# Altium PCB PA_Channel_RF.PcbDoc
Units mm, origin at the board's own origin, x right, y up, seen from the top; angles counter-clockwise.
Board outline 159.75 x 29.25 mm, 2 copper layers (Top Layer, Bottom Layer), stack 1.071 mm thick; 118 components, 85 nets, 368 pads, 403 vias.
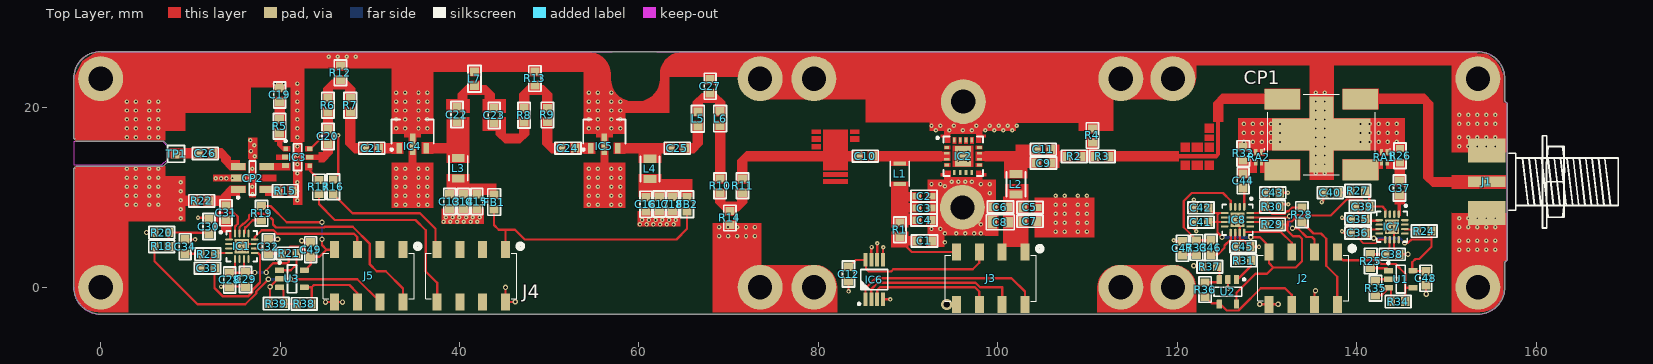
[diagram p0: Top Layer view]
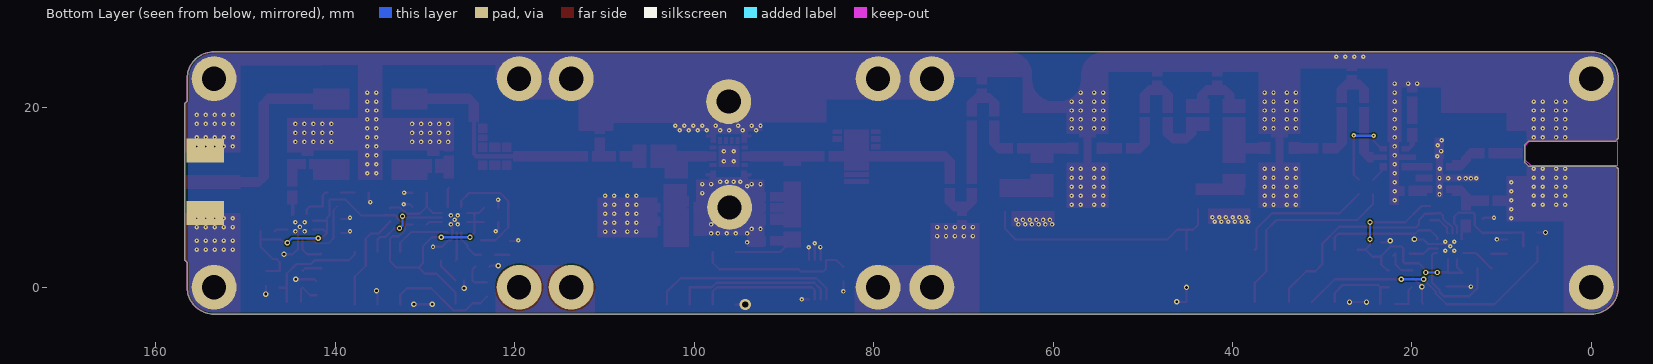
[diagram p1: Bottom Layer view, seen from below]
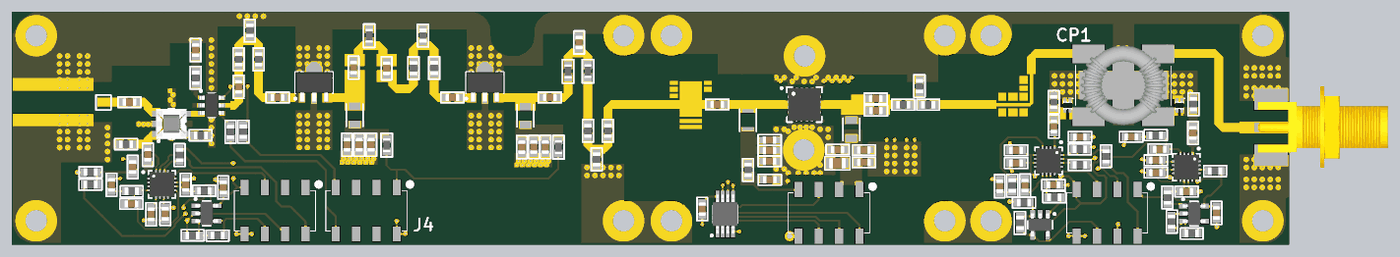
[diagram p2: 3D render of the assembled board from above, using the file's embedded part models]

## Layer stack, top to bottom
Top Solder: solder mask 0.0102, Solder Resist, Dk 3.5
Top Layer: signal copper 0.0356
Dielectric1: core 1, FR-4, Dk 4.8
Bottom Layer: signal copper 0.0356
Bottom Solder: solder mask 0.0102, Solder Resist, Dk 3.5

## Board outline
-3,0 -3,13.2 -2.7,13.5 7,13.5 7.4,13.9 7.4,15.9 7,16.3 -2.7,16.3 -3,16.6 -3,23.3 cw(c-0.05,23.3) -0.05,26.25 153.5,26.25 cw(c153.5,23.25) 156.5,23.25 156.5,20.75 156.75,20.5 156.75,3 156.5,2.75 156.5,0 cw(c153.5,0) 153.5,-3 0,-3 cw(c0,0)
cut-out: -2.925,16.25 6.9,16.25 7.4,15.7 7.4,14.2 6.775,13.575 -2.925,13.575

## Design rules (kind name [scope] priority, off if disabled: settings)
Clearance [All] p1: gap=0.152
PolygonConnect [All] p1: connectstyle=Direct reliefconductorwidth=0.254 reliefentries=4 polygonreliefangle="90 Angle" airgapwidth=0.254
RoomDefinition U_Output_protection [InComponentClass('U_Output_protection')] p1: confinementstyle=ConfineIn formatcopy=TRUE lockcomponents=FALSE outline 168.175,-30.4 179.075,-30.4 179.075,-7.725 168.175,-7.725
RoomDefinition U_Power_Stage [InComponentClass('U_Power_Stage')] p2: confinementstyle=ConfineIn formatcopy=TRUE lockcomponents=FALSE outline 117.525,-2.4 153.775,-2.4 153.775,25.6 117.525,25.6
RoomDefinition U_Preamp_protection [InComponentClass('U_Preamp_protection')] p3: confinementstyle=ConfineIn formatcopy=TRUE lockcomponents=FALSE outline -1.45,-2.1 75.825,-2.1 75.825,24.7 -1.45,24.7
RoomDefinition PA_Channel [InComponentClass('PA_Channel')] p4: confinementstyle=ConfineIn formatcopy=TRUE lockcomponents=FALSE outline 76.8,25.725 115.875,25.725 115.875,-1.525 76.8,-1.525
RoutingVias [All] p1: holewidth=0.711 width=1.27 viastyle="Through Hole" minholewidth=0.2 minwidth=0.5 maxholewidth=0.711 maxwidth=1.27
SolderMaskExpansion [All] p1: expansion=0.102
Width [All] p1: maxlimit=0.254 minlimit=0.152 preferedwidth=0.254
30 further rules are at their usual default settings.

## Classes and differential pairs
component class U_Output_protection: C35 C36 C37 C38 C39 C40 C41 C42 C43 C44 C45 C46 C47 C48 CP1 IC7 IC8 J2 R24 R25 R26 R27 R28 R29 R30 R31 R32 R33 R34 R35 R36 R37 RA1 RA2 U1 U2
component class PA_Channel: J1 TP1
component class U_Power_Stage: C1 C2 C3 C4 C5 C6 C7 C8 C9 C10 C11 C12 IC2 IC6 J3 L1 L2 R1 R2 R3 R4
component class U_Preamp_protection: C13 C14 C15 C16 C17 C18 C19 C20 C21 C22 C23 C24 C25 C26 C27 C28 C29 C30 C31 C32 C33 C34 C49 CP2 FB1 FB2 IC1 IC3 IC4 IC5 J4 J5 L3 L4 L5 L6 L7 R5 R6 R7 R8 R9 R10 R11 R12 R13 R14 R15 R16 R17 R18 R19 R20 R21 R22 R23 R38 R39 U3

## Components (designator, comment, footprint, x,y, rotation, side; value= is the part's Value field where it differs from the comment)
C1 "4.7u" 0603C#1 91.805,5.156 r0 top
C2 "10n" 0603C#2 91.775,10.15 r0 top
C3 "1n" 0603C#3 91.775,8.825 r0 top
C4 "100p" 0603C#4 91.775,7.475 r0 top
C5 "10n" 0603C#5 103.565,8.89 r0 top
C6 "1n" 0603C#6 100.289,8.941 r180 top
C7 "100p" 0603C#6 103.565,7.341 r0 top
C8 "10u/50V" 0805C 100.263,7.239 r180 top
C9 "680n" 0603C#6 105.089,13.843 r0 top
C10 "680n" 0603C#6 85.227,14.605 r0 top
C11 "1n" 0603C#6 105.064,15.367 r0 top
C12 "10n" 0603C#6 83.35,1.475 r90 top
C13 "4.7u" 0603C#6 38.9,9.55 r270 top
C14 "1n" 0603C#6 40.425,9.55 r270 top
C15 "10n" 0603C#6 41.925,9.55 r270 top
C16 "4.7u" 0603C#6 60.775,9.25 r270 top
C17 "1n" 0603C#6 62.275,9.275 r270 top
C18 "10n" 0603C#6 63.725,9.275 r270 top
C19 "680p" 0603C#6 19.949,21.438 r90 top
C20 "680p" 0603C#6 25.333,16.815 r90 top
C21 "680p" 0603C#6 30.21,15.494 r0 top
C22 "56p" 0603C#6 39.71,19.253 r90 top
C23 "220p" 0603C#6 43.85,19.15 r270 top
C24 "680p" 0603C#6 52.08,15.494 r0 top
C25 "680p" 0603C#6 64.272,15.494 r0 top
C26 "680p" 0603C#6 11.668,14.91 r0 top
C27 "5.6p" 0603C#6 67.929,22.403 r270 top
C28 "100n" 0603C#6 14.375,0.825 r270 top
C29 "100p" 0603C#6 16.15,0.875 r270 top
C30 "100n" 0603C#6 12.075,6.756 r270 top
C31 "470n" 0603C#6 13.98,8.306 r270 top
C32 "100n" 0603C#6 18.7,4.525 r270 top
C33 "100n" 0603C#6 11.9,2.125 r180 top
C34 "100n" 0603C#6 9.425,4.525 r90 top
C35 "100n" 0603C#6 140.125,7.6 r180 top
C36 "100p" 0603C#6 140.125,6.05 r180 top
C37 "470n" 0603C#6 144.764,11.049 r270 top
C38 "100n" 0603C#6 143.95,3.675 r180 top
C39 "100n" 0603C#6 140.6,9 r0 top
C40 "100n" 0603C#6 137.05,10.55 r180 top
C41 "100n" 0603C#6 122.625,7.25 r180 top
C42 "100p" 0603C#6 122.625,8.85 r180 top
C43 "100n" 0603C#6 130.625,10.525 r180 top
C44 "470n" 0603C#6 127.34,11.862 r270 top
C45 "100n" 0603C#6 127.3,4.525 r180 top
C46 "100n" 0603C#6 123.75,4.425 r90 top
C47 "100n" 0603C#6 120.575,4.35 r90 top
C48 "100n" 0603C#6 147.7,1 r90 top
C49 "100n" 0603C#6 23.403,4.191 r270 top
CP1 "COUPLER_CUST_TF" COUPLER_CUST_TF 136.052,17.018 r0 top
CP2 "20dB" XFMR_MINI-CIRCUITS_AT224 16.925,12.175 r90 top
FB1 "100R/1A" 0603L 43.85,9.5 r270 top
FB2 "100R/1A" 0603L 65.35,9.25 r270 top
IC1 "ADL5904ACPZN-R7" QFN50P300X300X80_HS-17N 15.732,4.572 r0 top
IC2 "RF_NPA1003QA" QFN65P400X400X80_HS-17N 96.125,14.6 r0 top
IC3 "HMC544A" SOT95P280X130-6N 21.955,14.503 r0 top
IC4 "MMG3012N" SOT89-150P410X170-3N 34.782,17.348 r90 top
IC5 "MMG3H21N" SOT89-150P410X170-3N 56.144,17.348 r90 top
IC6 "MCP9801-M/MS" SOP65P490X110-8N 86.225,0.85 r90 top
IC7 "ADL5904ACPZN-R7" QFN50P300X300X80_HS-17N 143.926,6.731 r270 top
IC8 "ADL5904ACPZN-R7" QFN50P300X300X80_HS-17N 126.7,7.525 r270 top
J1 "SMA" MOLEX_73251-2121 154.5,11.75 r180 top
J2 "ZL264-8DG" ZL264-8DG 134.02,1.016 r180 top
J3 "ZL264-8DG" ZL264-8DG 99.2,1 r180 top
J4 "ZL264-8DG" ZL264-8DG 41.31,1.27 r180 top
J5 "ZL264-8DG" ZL264-8DG 29.88,1.27 r180 top
L1 "1uH" INDP2520X18L#1 89.062,12.649 r90 top
L2 "1uH" INDP2520X18L#2 102.016,11.481 r90 top
L3 "1uH" INDP2520X18L#2 39.862,13.259 r90 top
L4 "1uH" INDP2520X18L#2 61.225,13.2 r90 top
L5 "33nH" 0603L 66.558,18.771 r90 top
L6 "33nH" 0603L 69.047,18.796 r270 top
L7 "330nH" 0603L 41.666,23.241 r90 top
R1 "33" 0603R#1 89.075,6.4 r270 top
R2 "4.87R" 0603R#1 108.493,14.58 r0 top
R3 "4.87R" 0603R#1 111.617,14.58 r0 top
R4 "1k" 0603R#1 110.525,16.916 r270 top
R5 "49R9" 0603R#1 19.949,17.958 r270 top
R6 "8.06" 0603R#1 25.333,20.295 r270 top
R7 "8.06" 0603R#1 27.825,20.275 r90 top
R8 "24" 0603R#1 47.2,19.175 r270 top
R9 "24" 0603R#1 49.8,19.2 r90 top
R10 "8.06" 0603R#1 69.047,11.303 r90 top
R11 "8.06" 0603R#1 71.536,11.303 r270 top
R12 "147R" 0603R#1 26.725,23.9 r270 top
R13 "36.5" 0603R#1 48.397,23.266 r90 top
R14 "140" 0603R#1 70.139,7.722 r270 top
R15 "49R9" 0603R#1 20.584,10.744 r0 top
R16 "100R" 0603R#1 25.925,11.2 r270 top
R17 "100R" 0603R#1 24.325,11.175 r270 top
R18 "4k7" 0603R#1 6.791,4.547 r0 top
R19 "10k" 0603R#1 17.942,8.255 r270 top
R20 "10k" 0603R#1 6.8,6.1 r0 top
R21 "4k7" 0603R#1 21.025,3.775 r180 top
R22 "24.9" 0603R#1 11.25,9.625 r180 top
R23 "4R02" 0603R#1 11.95,3.7 r180 top
R24 "10k" 0603R#1 147.525,6.25 r180 top
R25 "4k7" 0603R#1 141.55,2.925 r90 top
R26 "24R9" 0603R#2 144.815,14.656 r90 top
R27 "4R02" 0603R#1 140.1,10.75 r180 top
R28 "4k7" 0603R#1 133.875,8.1 r90 top
R29 "10k" 0603R#1 130.6,7 r180 top
R30 "10k" 0603R#1 130.6,8.975 r180 top
R31 "4k7" 0603R#1 127.4,2.975 r180 top
R32 "24R9" 0603R#1 127.34,14.91 r90 top
R33 "4R02" 0603R#1 122.15,4.425 r270 top
R34 "10k" 0603R#1 144.6,-1.6 r180 top
R35 "10k" 0603R#1 142.1,-0.1 r90 top
R36 "10k" 0603R#1 123.098,-0.254 r90 top
R37 "10k" 0603R#1 123.606,2.286 r180 top
R38 "10k" 0603R#1 22.692,-1.854 r180 top
R39 "10k" 0603R#1 19.568,-1.829 r180 top
RA1 "EXB-24AT3AR3X" CAC-65P100X100-4L 143.062,14.478 r270 top
RA2 "EXB24ATAAR5X" CAC-65P100X100-4L 129.067,14.478 r270 top
TP1 "Test Point" TPS127 8.417,14.859 r0 top
U1 "LMV321M5X" DBV0005A_N 144.9,0.9 r0 top
U2 "LMV321M5X" DBV0005A_N 125.638,-0.508 r270 top
U3 "LMV321M5X" DBV0005A_N 21.32,0.94 r0 top

## Footprints (in the part's own frame and the unit in brackets; to place one, negate y for a bottom-side part, rotate by r counter-clockwise, add the part's x,y. Pads: shape width x height; smd on the part's side, far side on the other; paste and mask are expansions set on the pad)
0603C#1 [mm]
  rect 0.95x0.95 smd: 1(-0.8,0) 2(0.8,0)
  silkscreen extent -1.45,-0.66 1.45,0.66, body extent -0.87,-0.47 0.88,0.48, height 0.87
0603C#2 [mm]
  rect 0.95x0.75 smd: 1(-0.8,0) 2(0.8,0)
  silkscreen extent -1.45,-0.66 1.45,0.66, body extent -0.87,-0.47 0.88,0.48, height 0.87
0603C#3 [mm]
  rect 0.95x0.8 smd: 1(-0.8,0) 2(0.8,0)
  silkscreen extent -1.45,-0.66 1.45,0.66, body extent -0.87,-0.47 0.88,0.48, height 0.87
0603C#4 [mm]
  rect 0.95x0.8 smd: 1(-0.8,0)
  rect 0.95x0.95 smd: 2(0.8,0)
  silkscreen extent -1.45,-0.66 1.45,0.66, body extent -0.87,-0.47 0.88,0.48, height 0.87
0603C#5 [mm]
  rect 0.95x1 smd: 1(-0.8,0)
  rect 0.95x0.8 smd: 2(0.8,0)
  silkscreen extent -1.45,-0.66 1.45,0.66, body extent -0.87,-0.47 0.88,0.48, height 0.87
0603C#6 [mm]
  rect 0.95x1 smd: 1(-0.8,0) 2(0.8,0)
  silkscreen extent -1.45,-0.66 1.45,0.66, body extent -0.87,-0.47 0.88,0.48, height 0.87
0603L [mm]
  rect 0.95x1 smd: 1(-0.8,0) 2(0.8,0)
  silkscreen extent -1.47,-0.71 1.47,0.71, body extent -0.87,-0.47 0.88,0.48, height 0.7
0603R#1 [mm]
  rect 0.9x1 smd: 1(-0.8,0) 2(0.8,0)
  silkscreen extent -1.42,-0.69 1.42,0.69, body extent -0.87,-0.47 0.88,0.48, height 0.55
0603R#2 [mm]
  rect 0.8x0.9 smd: 1(-0.8,0) 2(0.8,0)
  silkscreen extent -1.42,-0.69 1.42,0.69, body extent -0.87,-0.47 0.88,0.48, height 0.55
0805C [mm]
  rect 1.05x1.2 smd: 1(-0.9,0)
  rect 1.05x1.4 smd: 2(0.9,0)
  silkscreen extent -1.57,-0.84 1.57,0.84, body extent -1.05,-0.67 1.05,0.68, height 1.25
CAC-65P100X100-4L [mm] "Chip Array, ConvexE, 4-Leads, Pitch 0.65mm,  Body 1.00x1.00mm,  IPC High Density"
  rect 0.65x0.35 smd: 1(-0.6,0.325) 2(-0.6,-0.325) 3(0.6,-0.325) 4(0.6,0.325)
  silkscreen extent -0.94,0.59 -0.84,0.68, body extent -0.6,-0.55 0.6,0.55, height 0.45
COUPLER_CUST_TF [mm]
  rect 4x2.3 smd: 1(-4.362,3.95) 2(4.337,3.95) 3(-4.362,-3.95) 4(4.363,-3.95)
  rect 11x3.56 smd: 5(0,0)
  rect 2.67x8.5 smd: 6(0,0)
  silkscreen extent -6,-4.5 6,4.5, body extent -5.38,-5 5.38,5, height 7.86
DBV0005A_N [mm] "SOT23, 5-Leads, Body 3.05x1.75mm, Pitch 0.95mm, IPC Medium Density"
  rrect17% 1x0.6 smd: 1(-1.375,0.95) 2(-1.375,0) 3(-1.375,-0.95) 4(1.375,-0.95) 5(1.375,0.95)
  silkscreen extent -1.5,-1.55 0.5,1.92, body extent -1.42,-1.46 1.42,1.46, height 1.08
INDP2520X18L#1 [mm] "Precision Wire Wound Inductor, 2-Leads, Body 2.5x2.0mm, IPC High Density"
  rect 0.45x1.4 smd: 1(-1.125,0) 2(1.125,0)
  silkscreen extent -1.4,-1.05 1.4,1.05, body extent -1.35,-1.05 1.35,1.05, height 1.8
INDP2520X18L#2 [mm] "Precision Wire Wound Inductor, 2-Leads, Body 2.5x2.0mm, IPC High Density"
  rect 0.9x1.4 smd: 1(-1.125,0) 2(1.125,0)
  silkscreen extent -1.4,-1.05 1.4,1.05, body extent -1.35,-1.05 1.35,1.05, height 1.8
MOLEX_73251-2121 [mm] "50 Ohm, SMA Edge Mount PCB, With Jam Nut And Lock Washer"
  rect 4.19x1.2 smd: 1(0,0)
  rect 4.19x2.665 smd: 2(0,3.492) 2(0,-3.492)
  rect 4.19x2.665 smd far side: 2(0,3.492) 2(0,-3.492)
  silkscreen extent -14.64,-5.13 -2.44,5.13, body extent -14.64,-5.13 1.62,5.13, height 5.76
QFN50P300X300X80_HS-17N [mm] "QFN, 16-Leads, Body 3.00x3.00mm, Pitch 0.50mm, Thermal Pad 1.60x1.60mm, IPC Medium Density"
  oval 0.85x0.25 smd: 1(-1.425,0.75) 2(-1.425,0.25) 3(-1.425,-0.25) 4(-1.425,-0.75) 9(1.425,-0.75) 10(1.425,-0.25) 11(1.425,0.25) 12(1.425,0.75)
  oval 0.25x0.85 smd: 5(-0.75,-1.425) 6(-0.25,-1.425) 7(0.25,-1.425) 8(0.75,-1.425) 13(0.75,1.425) 14(0.25,1.425) 15(-0.25,1.425) 16(-0.75,1.425)
  rect 1.6x1.6 smd: 17(0,0)
  silkscreen extent -2.47,-1.7 1.7,1.7, body extent -1.58,-1.58 1.58,1.58, height 0.8
QFN65P400X400X80_HS-17N [mm] "QFN, 16-Leads, Body 4.00x4.00mm, Pitch 0.65mm, Thermal Pad 2.25x2.25mm, IPC Medium Density"
  rect 0.5x0.3 smd: 1(-1.825,0.975)
  rect 0.6x0.3 smd: 2(-1.825,0.325) 3(-1.825,-0.325)
  rect 0.55x0.3 smd: 4(-1.825,-0.975) 9(1.825,-0.975) 10(1.825,-0.325) 11(1.825,0.325) 12(1.825,0.975)
  rect 0.3x0.55 smd: 5(-0.975,-1.825) 6(-0.325,-1.825) 7(0.325,-1.825) 8(0.975,-1.825) 13(0.975,1.825) 14(0.325,1.825) 15(-0.325,1.825) 16(-0.975,1.825)
  rect 1.8x2.25 smd: 17(0,0)
  silkscreen extent -2.97,-2.2 2.2,2.2, body extent -2.07,-2.07 2.07,2.07, height 0.8
SOP65P490X110-8N [mm] "SOP, 0.65mm pitch; 8 pin, 3.00mm W X 3.00mm L X 1.10mm H body, IPC Medium Density"
  rect 1.5x0.45 smd: 1(-2.2,0.975) 2(-2.2,0.325) 3(-2.2,-0.325) 4(-2.2,-0.975) 5(2.2,-0.975) 6(2.2,-0.325) 7(2.2,0.325) 8(2.2,0.975)
  silkscreen extent -2.82,-1.5 1.12,1.82, body extent -2.45,-1.55 2.45,1.55, height 1.1
SOT89-150P410X170-3N [mm] "SOT89, 3-Leads, Body 4.55x2.55mm, Pitch 1.50mm, Lead Span 4.1mm, IPC Medium Density"
  rect 1.2x0.6 smd: 1(-1.85,1.5) 3(-1.85,-1.5)
  rect 2.4x0.6 smd: 2(-1.4,0)
  Top Layer region: -0.2,0.3 0.5,1 1.9,1 2.6,0.3 2.6,-0.3 1.9,-1 0.5,-1 -0.2,-0.3
  silkscreen extent -2.12,-2.35 1.35,2.47, body extent -2.35,-2.35 1.35,2.35, height 1.7
SOT95P280X130-6N [mm] "SOT23, 6-Leads, Body 2.90x2.80mm, Pitch 0.95mm, IPC Medium Density"
  rect 0.5x0.52 smd: 1(-1.35,0.95)
  rect 0.8x0.55 smd: 2(-1.35,0)
  rect 0.8x0.54 smd: 3(-1.35,-0.95)
  rect 0.55x0.5 smd: 4(1.35,-0.95)
  rect 0.8x0.5 smd: 5(1.35,0)
  rect 0.6x0.5 smd: 6(1.35,0.95)
  silkscreen extent -1.47,-1.5 0.45,1.92, body extent -1.5,-1.5 1.5,1.5, height 1.3
TPS127 [mm] "1.27 x  1.27mm SMD Test Point Area"
  rect 1x1 smd paste-1.27: 1(0,0)
  silkscreen extent -0.94,-0.94 0.94,0.94
XFMR_MINI-CIRCUITS_AT224 [mm] "MINI-CIRCUITS RF Transformer, Case AT224 - Body 3.81X3.81mm"
  rect 0.76x1.65 smd: 1(-1.27,1.59) 2(0,1.59) 3(1.27,1.59) 4(1.27,-1.59) 6(-1.27,-1.59)
  silkscreen extent -2.3,-0.37 1.91,1.72, body extent -1.9,-1.9 1.91,1.91, height 3.81
ZL264-8DG [mm]
  rect 1x1.9 smd: 1(-3.81,-2.921) 2(-3.81,2.921) 3(-1.27,-2.921) 4(-1.27,2.921) 5(1.27,-2.921) 6(1.27,2.921) 7(3.81,-2.921) 8(3.81,2.921)
  silkscreen extent -5.74,-3.59 5.08,2.54, body extent -5.08,-3.56 5.08,3.56, height 7.5

## Part data
C1 C2 C3 C4 C5 C6 C7 C9 C10 C11 C12 C13 C14 C15 C16 C17 C18 C19 C20 C21 C22 C23 C24 C25 C26 C27 C28 C29 C30 C31 C32 C33 C34 C35 C36 C37 C38 C39 C40 C41 C42 C43 C44 C45 C46 C47 C48 C49: library part CAP_SMD_0603, "Capacitor SMD"
C8: library part CAP_SMD_0805, "Capacitor SMD"
CP1: library part IND_COUPLER_TF, "custom coupler"
CP2: "50 Ohms directional coupler"
FB1 FB2: library part L_FERRITE_BEAD_0603, "ferrite bead 100R@100MHz 1A"
IC1 IC7 IC8: library part ADL5904, "DC   to 6 GHz  , 45 dB DC  to 6 GHz , 45 dB TruPwr Detector with Envelope Threshold Detection"
IC3: library part RF_HMC544AE
IC4: library part RF_MMG3012N, "Broadband High Linearity Amplifier"
IC5: library part RF_MMG3H21N, "Broadband High Linearity Amplifier"
IC6: "2-Wire High-Accuracy Temperature Sensor"
J1: library part MOLEX_73251-2121
J2 J3 J4 J5: library part "CON_2X4 2.54 SMT FEM", "2.54mm pitch connector"
L2 L3 L4: "100uH, 60mA, 21R"
L5 L6 L7: library part L_0603_1uH, "1uH, 25mA, 0.6R"
R1 R2 R3 R4 R5 R6 R7 R8 R9 R10 R11 R12 R13 R14 R15 R16 R17 R18 R19 R20 R21 R22 R23 R24 R25 R26 R27 R28 R29 R30 R31 R32 R33 R34 R35 R36 R37 R38 R39: library part RES_0603, "SMD Resistor"
RA1: library part RES_ATT_3dB, "3dB Chip Attenuator"
RA2: library part RES_ATT_10dB, "10dB Chip Attenuator"
TP1: library part SMD_PAD_1.27X1.27MM
U1 U2 U3: library part CMP-0055-01048-3, "General Purpose, Low Voltage, Rail-to-Rail Output Operational Amplifiers, 5-pin SOT-23"

## Free pads (board coordinates)
  round 5 hole 2.7 unplated: 0(119.5,0) 2(96.05,8.9) 4(113.7,0) 5(119.5,23.25) 6(79.5,0) 7(153.5,0) 8(73.5,0) 9(79.5,23.25) 10(153.5,23.25) 11(113.7,23.25) 12(0,0) 13(96.15,20.7) 14(0,23.25) 15(73.5,23.25)

## Via types
v1: diameter 0.5, hole 0.2, Top Layer to Bottom Layer, 374 vias
v2: diameter 0.6, hole 0.3, Top Layer to Bottom Layer, 28 vias
v3: diameter 1.27, hole 0.711, Top Layer to Bottom Layer, 1 vias

## Nets (pads, with @x,y where several pads share a name; then routed paths per layer and width w, separated by ;. In a path a pad name is that pad's centre, name@x,y a point inside that pad or via, vN(x,y) a via of type N, cw(c..) or ccw(c..) an arc to the next point about the centre after c; other vN are vias at no path point)
ADL_Q: IC1.12 J5.5 | length 13.7
  Top Layer w0.254: IC1.12 17.18,5.345 17.18,5.588 17.942,6.35 19.272,6.35 19.653,5.969 28.229,5.969 28.61,5.588 J5.5
ALERT: IC6.3 J3.6 | length 14.2
  Top Layer w0.254: IC6.3 86.55,-0.3 86.85,0 97.444,0 97.93,-0.486 J3.6
FR_Q: IC8.12 J2.5 | length 6.8
  Top Layer w0.254: IC8.12 127.517,6.167 131.533,6.167 132.75,4.95 J2.5
FR_RST: IC8.15 J2.3 | length 10.3
  Top Layer w0.254: IC8.15 128.125,7.779 131.966,7.779 131.97,7.775 132.375,7.775 v2(132.5,7.9) ; v2(132.829,6.571) 133.429,6.571 134.4,5.6 135,5.6 135.29,5.31 J2.3
  Bottom Layer w0.254: v2(132.5,7.9) 132.5,6.9 v2(132.829,6.571)
FR_VREF: J2.2 R28.1 | length 11.4
  Top Layer w0.254: R28.1 133.919,7.3 134.279,6.94 134.279,6.896 135.175,6 136,6 136.6,5.4 136.6,2.4 137.83,1.17 J2.2
FRPWR: J2.6 R36.1 U2.4 | length 12.7
  Top Layer w0.254: R36.1 123.827,-1.783 124.688,-1.783 125.505,-2.6 126.812,-2.6 127.142,-2.27 127.142,-2.258 129.3,-0.1 132,-0.1 132.75,-0.85 J2.6
GND: C1.2 C2.2 C3.2 C4.2 C5.2 C6.2 C7.2 C8.2 C12.1 C13.2 C14.2 C15.2 C16.2 C17.2 C18.2 C19.2 C27.1 C28.2 C29.2 C30.1 C32.1 C34.2 C35.2 C36.2 C38.1 C40.2 C41.2 C42.2 C43.1 C45.1 C47.2 C48.1 C49.1 CP1.5 CP1.6 CP2.2 IC1.11 IC1.17 IC2.17 IC3.2 IC4.2 IC5.2 IC6.4 IC6.5 IC6.6 IC6.7 IC7.11 IC7.17 IC8.11 IC8.17 J1.2 J2.4 J2.8 J3.8 J4.2 J5.8 L7.2 pad.2 pad.5 pad.6 pad.7 pad.8 pad.9 pad.10 pad.11 pad.12 pad.13 pad.14 pad.15 R4.1 R12.1 R13.2 R14.2 R15.2 R20.1 R22.2 R26.2 R30.1 R32.2 R35.2 R37.2 R39.2 RA1.1 RA1.2 RA2.1 RA2.2 U1.2 U2.2 U3.2 | length 53.5
  Top Layer w0.254: v2(5.111,6.1) R20.1 ; C34.2 v1(10.525,5.325) v1@10.6,5.25 ; v1(10.85,7.75) 11.975,7.75 C30.1@12.1,7.625 ; v1@13.35,0 v1(13.425,0.075) C29.2 ; v1(15.732,4.572) 15.982,4.822 IC1.11 18.197,4.822 C32.1 19.711,5.325 v2(19.72,5.334) ; R39.2 18.881,-1.715 v2(18.881,0.05) 19.771,0.94 U3.2@20.045,0.94 ; v2(22.4,5.2) 22.4,5.067 22.476,4.991 C49.1 ; v2(25.054,-1.651) J5.8 v2(26.959,-1.651) ; v2(45.12,-0.02) J4.2 46.149,-1.651 v2(46.2,-1.6) ; v1@83.28,-0.529 v1(83.35,-0.459) C12.1 ; IC6.7 85.9,4.453 v1(85.921,4.475) ; v1@86.531,4.932 v1(86.55,4.913) IC6.6 ; IC6.4 v1(88,-1.35) ; IC6.5 87.2,4.432 v1(87.217,4.449) ; v3(94.285,-1.921) J3.8 ; v1(119.6,5.25) 119.7,5.15 C47.2 ; C41.2 121.825,6.525 v1(122.1,6.25) ; C42.2 121.825,9.725 v1(121.85,9.75) ; v2(121.828,2.413) 122.679,2.413 R37.2 ; v2(125.638,-0.127) U2.2@125.638,0.767 ; v1(126.7,7.525) 126.95,7.275 126.95,5.4 127.1,5.25 127.375,5.25 C45.1 129.075,4.525 v1(129.1,4.5) ; v2(129.194,-1.905) J2.8 v2(131.226,-1.905) ; R30.1 131.675,9.25 v1(132.35,9.25) ; C43.1 v1(132.325,10.525) v1@132.35,10.5 ; J2.4 135.29,-0.51 v2(135.4,-0.4) ; v1(136.1,9.5) 136.25,9.65 C40.2 ; v1(138.35,6.25) 138.55,6.05 C36.2 ; v1(138.35,7.75) 138.5,7.6 C35.2 ; R35.2 142.3,0.9 v2(144.4,0.9) ; IC7.17@144.15,6.425 144.15,4.275 C38.1 145.696,3.675 v2(145.704,3.683) ; C48.1 147.7,-0.726 v2(147.736,-0.762)
  other v1: 15.275,4.064 16.291,4.064 151.425,4.2 152.425,4.2 153.425,4.2 154.425,4.2 155.425,4.2 94.1,5 15.275,5.08 16.291,5.08 151.425,5.2 152.425,5.2 153.425,5.2 154.425,5.2 155.425,5.2 68.925,5.7 69.925,5.7 70.925,5.7 71.925,5.7 72.925,5.7 94.1,6 95.35,6 96.35,6 97.35,6 98.1,6 106.425,6.2 107.425,6.2 108.925,6.2 109.925,6.2 143.418,6.223 144.434,6.223 92.6,6.5 93.6,6.5 68.925,6.7 69.925,6.7 70.925,6.7 71.925,6.7 72.925,6.7 151.425,6.7 152.425,6.7 153.425,6.7 154.425,6.7 155.425,6.7 143.926,6.731 60.1,7 60.85,7 61.6,7 62.35,7 63.1,7 63.85,7 98.1,7 126.35,7 127.1,7 106.425,7.2 107.425,7.2 108.925,7.2 109.925,7.2 143.418,7.239 144.434,7.239 38.225,7.3 38.975,7.3 39.725,7.3 40.475,7.3 41.225,7.3 41.975,7.3 60.35,7.5 61.1,7.5 61.85,7.5 62.6,7.5 63.35,7.5 64.1,7.5 8.925,7.7 151.425,7.7 152.425,7.7 153.425,7.7 154.425,7.7 155.425,7.7 38.475,7.8 39.225,7.8 39.975,7.8 40.725,7.8 41.475,7.8 42.225,7.8 126.35,8 127.1,8 106.425,8.2 107.425,8.2 108.925,8.2 109.925,8.2 8.925,8.7 2.925,9.2 3.925,9.2 5.425,9.2 6.425,9.2 32.925,9.2 33.925,9.2 35.425,9.2 36.425,9.2 54.425,9.2 55.425,9.2 56.925,9.2 57.925,9.2 106.425,9.2 107.425,9.2 108.925,9.2 109.925,9.2 8.925,9.7 21.925,9.7 2.925,10.2 3.925,10.2 5.425,10.2 6.425,10.2 32.925,10.2 33.925,10.2 35.425,10.2 36.425,10.2 54.425,10.2 55.425,10.2 56.925,10.2 57.925,10.2 106.425,10.2 107.425,10.2 108.925,10.2 109.925,10.2 16.925,10.35 99.1,10.5 8.925,10.7 21.925,10.7 2.925,11.2 3.925,11.2 5.425,11.2 6.425,11.2 16.9,11.2 32.925,11.2 33.925,11.2 35.425,11.2 36.425,11.2 54.425,11.2 55.425,11.2 56.925,11.2 57.925,11.2 94.1,11.25 92.6,11.5 93.6,11.5 98.1,11.5 99.1,11.5 8.925,11.7 21.925,11.7 94.85,11.75 95.6,11.75 96.35,11.75 97.1,11.75 13.425,12.125 14.025,12.125 12.825,12.15 14.7,12.15 15.975,12.15 16.925,12.175 2.925,12.2 3.925,12.2 5.425,12.2 6.425,12.2 32.925,12.2 33.925,12.2 35.425,12.2 36.425,12.2 54.425,12.2 55.425,12.2 56.925,12.2 57.925,12.2 21.925,12.7 135.425,12.7 136.425,12.7 2.925,13.2 3.925,13.2 5.425,13.2 6.425,13.2 16.9,13.2 32.925,13.2 33.925,13.2 35.425,13.2 36.425,13.2 54.425,13.2 55.425,13.2 56.925,13.2 57.925,13.2 21.925,13.7 135.425,13.7 136.425,13.7 95.575,14.05 96.675,14.05 17.175,14.6 21.925,14.7 135.425,14.7 136.425,14.7 95.575,15.15 96.675,15.15 16.75,15.175 21.925,15.7 135.425,15.7 136.425,15.7 151.425,15.7 152.425,15.7 153.425,15.7 154.425,15.7 155.425,15.7 17.125,15.825 127.425,16.2 128.425,16.2 129.425,16.2 130.425,16.2 131.425,16.2 140.425,16.2 141.425,16.2 142.425,16.2 143.425,16.2 144.425,16.2 16.7,16.375 2.925,16.7 3.925,16.7 5.425,16.7 6.425,16.7 21.925,16.7 135.425,16.7 136.425,16.7 151.425,16.7 152.425,16.7 153.425,16.7 154.425,16.7 155.425,16.7 127.425,17.2 128.425,17.2 129.425,17.2 130.425,17.2 131.425,17.2 140.425,17.2 141.425,17.2 142.425,17.2 143.425,17.2 144.425,17.2 93.1,17.5 94.6,17.5 96.1,17.5 97.1,17.5 98.6,17.5 99.6,17.5 100.6,17.5 101.6,17.5 2.925,17.7 3.925,17.7 5.425,17.7 6.425,17.7 21.925,17.7 32.925,17.7 33.925,17.7 35.425,17.7 36.425,17.7 54.425,17.7 55.425,17.7 56.925,17.7 57.925,17.7 135.425,17.7 136.425,17.7 92.6,18 93.6,18 95.1,18 97.6,18 99.1,18 100.1,18 101.1,18 102.1,18 127.425,18.2 128.425,18.2 129.425,18.2 130.425,18.2 131.425,18.2 140.425,18.2 141.425,18.2 142.425,18.2 143.425,18.2 144.425,18.2 151.425,18.2 152.425,18.2 153.425,18.2 154.425,18.2 155.425,18.2 2.925,18.7 3.925,18.7 5.425,18.7 6.425,18.7 21.925,18.7 32.925,18.7 33.925,18.7 35.425,18.7 36.425,18.7 54.425,18.7 55.425,18.7 56.925,18.7 57.925,18.7 135.425,18.7 136.425,18.7 151.425,19.2 152.425,19.2 153.425,19.2 154.425,19.2 155.425,19.2 2.925,19.7 3.925,19.7 5.425,19.7 6.425,19.7 21.925,19.7 32.925,19.7 33.925,19.7 35.425,19.7 36.425,19.7 54.425,19.7 55.425,19.7 56.925,19.7 57.925,19.7 135.425,19.7 136.425,19.7 2.925,20.7 3.925,20.7 5.425,20.7 6.425,20.7 21.925,20.7 32.925,20.7 33.925,20.7 35.425,20.7 36.425,20.7 54.425,20.7 55.425,20.7 56.925,20.7 57.925,20.7 135.425,20.7 136.425,20.7 21.925,21.7 32.925,21.7 33.925,21.7 35.425,21.7 36.425,21.7 54.425,21.7 55.425,21.7 56.925,21.7 135.425,21.7 136.425,21.7 19.425,22.7 20.425,22.7 21.925,22.7 25.425,25.7 26.425,25.7 27.425,25.7 28.425,25.7
IN_PWR: R31.1 U2.1 | length 2.9
  Top Layer w0.254: U2.1@126.588,0.767 128.2,2.379 R31.1
INPWR: J5.6 R38.1 U3.4 | length 9.4
  Top Layer w0.254: U3.4@22.595,-0.01 23.52,-0.01 ; R38.1 23.52,-1.826 23.52,-0.01 ; J5.6 28.61,-0.635 27.721,0.254 23.784,0.254 23.52,-0.01
NetC2_1: C2.1 C3.1 C4.1 L1.1 R1.1
NetC9_1: C9.1 C11.1 IC2.10 IC2.11 L2.2
NetC9_2: C9.2 C11.2 R2.1
NetC10_1: C10.1 R11.1
NetC10_2: C10.2 IC2.2 IC2.3 L1.2
NetC13_1: C13.1 C14.1 C15.1 FB1.1 L3.1
NetC16_1: C16.1 C17.1 C18.1 FB2.1 L4.1
NetC19_1: C19.1 R5.1
NetC20_2: C20.2 R6.2
NetC21_1: C21.1 R7.1
NetC21_2: C21.2 IC4.1
NetC22_1: C22.1 IC4.3 L3.2
NetC22_2: C22.2 C23.1 L7.1
NetC23_2: C23.2 R8.2
NetC24_1: C24.1 R9.1
NetC24_2: C24.2 IC5.1
NetC25_1: C25.1 IC5.3 L4.2
NetC25_2: C25.2 L5.1
NetC26_1: C26.1 TP1.1
NetC26_2: C26.2 CP2.3
NetC27_2: C27.2 L5.2 L6.1
NetC30_2: C30.2 IC1.16 R18.2 R20.2 | length 13.2
  Top Layer w0.254: R18.2 7.591,6.091 8.797,6.091 8.809,6.079 12.075,6.079 C30.2 12.989,6.871 12.989,8.128 13.166,8.305 14.844,8.305 15.275,7.874 15.275,7.075 14.982,6.782 IC1.16
NetC31_1: C31.1 CP2.1 R22.1
NetC31_2: C31.2 IC1.1
NetC32_2: C32.2 IC1.10 R21.2 | length 3.3
  Top Layer w0.254: IC1.10 18.103,4.322 C32.2 20.175,3.725 R21.2
NetC33_1: C33.1 IC1.9 | length 12.2
  Top Layer w0.254: C33.1 12.7,-0.092 13.624,-1.016 16.429,-1.016 16.929,-0.516 16.929,-0.296 17.759,0.534 17.759,3.59 17.528,3.822 IC1.9
NetC33_2: C33.2 IC1.4 R23.1 | length 3.9
  Top Layer w0.254: C33.2 11.175,2.125 R23.1 12.872,3.822 IC1.4
NetC34_1: C34.1 R23.2 | length 1.7
  Top Layer w0.254: C34.1 11.125,3.725 R23.2
NetC37_1: C37.1 R26.1 RA1.4
NetC37_2: C37.2 IC7.1 | length 2
  Top Layer w0.254: C37.2@144.575,10.1 144.65,10.025 IC7.1@144.65,8.1
NetC38_2: C38.2 IC7.10 R25.2 | length 3.4
  Top Layer w0.254: R25.2 141.6,3.675 C38.2 143.65,4.175 IC7.10@143.65,5.25
NetC39_1: C39.1 IC7.9 | length 7.1
  Top Layer w0.203: C39.1 140.196,8.604 140.196,5.445 140.734,4.907 142.123,4.907 142.522,5.306 IC7.9
NetC39_2: C39.2 IC7.4 R27.1 | length 4.3
  Top Layer w0.254: R27.1@140.9,10.55 140.925,10.525 141.125,10.525 141.4,10.25 C39.2 142.85,9 143.176,8.674 IC7.4
NetC40_1: C40.1 R27.2 | length 1.5
  Top Layer w0.254: C40.1 139.3,10.55 R27.2@139.325,10.525
NetC43_2: C43.2 IC8.16 R28.2 R30.2 | length 8.3
  Top Layer w0.254: IC8.16 129.1,8.275 R30.2 ; C43.2 129.8,10.5 R30.2 ; R28.2@133.875,8.775 R28.2 132.814,8.9 132.393,8.479 132.26,8.479 131.976,8.196 130.579,8.196 R30.2
NetC44_1: C44.1 R32.1 RA2.3
NetC44_2: C44.2 IC8.1 | length 2.2
  Top Layer w0.254: C44.2 127.45,10.952 IC8.1
NetC45_2: C45.2 IC8.10 R31.2 | length 3.2
  Top Layer w0.254: IC8.10 126.45,3.125 R31.2
NetC46_1: C46.1 IC8.9 | length 3.8
  Top Layer w0.254: C46.1 124.475,3.625 125.256,4.406 125.256,4.656 125.95,5.35 IC8.9
NetC46_2: C46.2 IC8.4 R33.1 | length 13.3
  Top Layer w0.254: C46.2 R33.1 120.7,6.675 120.7,9.6 121.6,10.5 125.1,10.5 125.95,9.65 IC8.4
NetC47_1: C47.1 R33.2 | length 1.6
  Top Layer w0.254: C47.1 120.65,3.625 R33.2
NetCP1_1: CP1.1 R3.2
NetCP1_2: CP1.2 J1.1
NetCP1_3: CP1.3 RA2.4
NetCP1_4: CP1.4 RA1.3
NetCP2_4: CP2.4 IC3.3
NetCP2_6: CP2.6 R15.1
NetIC1_14: IC1.14 R19.2 | length 2.9
  Top Layer w0.254: IC1.14 16.078,6.093 16.078,6.7 16.186,6.7 16.941,7.455 R19.2
NetIC3_1: IC3.1 R5.2
NetIC3_4: IC3.4 R17.1 | length 2
  Top Layer w0.254: IC3.4@23.325,13.55 23.325,12.975 R17.1
NetIC3_6: IC3.6 R16.1 | length 9.2
  Top Layer w0.254: IC3.6@23.325,15.45 23.4,15.45 24.275,16.325 v1(24.275,16.875) ; R16.1 26.475,12.55 v1(26.475,16.925)
  Bottom Layer w0.254: v1(24.275,16.875) 26.45,16.875 v1@26.475,16.9
NetIC7_14: IC7.14 R24.2 | length 1.5
  Top Layer w0.254: IC7.14@145.325,6.425 146.55,6.425 R24.2
NetIC8_14: IC8.14 R29.2 | length 1.8
  Top Layer w0.254: IC8.14 129.525,7.275 R29.2
NetL6_2: L6.2 R10.2
NetR2_2: R2.2 R3.1 R4.2
NetR6_1: R6.1 R7.2 R12.2
NetR8_1: R8.1 R9.2 R13.1
NetR10_1: R10.1 R11.2 R14.1
NetR21_1: R21.1 U3.1 | length 3.8
  Top Layer w0.254: U3.1 21.19,1.89 21.825,2.525 R21.1 R21.1@22.1,3.5
NetR25_1: R25.1 U1.1 | length 2.2
  Top Layer w0.254: R25.1 143.35,2.125 U1.1@143.625,1.85
NetR34_2: R34.2 R35.1 U1.3 | length 3.5
  Top Layer w0.254: R35.1 142.775,-0.9 143.625,-0.05 143.8,-0.225 R34.2
NetR36_2: R36.2 R37.1 U2.3 | length 3.3
  Top Layer w0.254: R36.2 124.467,0.546 124.688,0.767 124.688,2.004 R37.1
NetR38_2: R38.2 R39.1 U3.3 | length 3.5
  Top Layer w0.254: U3.3@20.045,-0.01 20.368,-0.333 R39.1 20.393,-1.854 R38.2
P3V3: C12.2 IC6.8 J3.5 | length 17.6
  Top Layer w0.254: C12.2 83.375,2.275 84.15,3.05 IC6.8 85.294,3.006 85.294,2.056 85.6,1.75 88.1,1.75 88.35,2 97.2,2 97.93,2.73 J3.5
P3V3A: C35.1 C36.1 C41.1 C42.1 C48.2 IC7.5 IC7.7 IC8.5 IC8.7 J2.7 R24.1 R29.1 U1.5 U2.5 | length 63.3
  Top Layer w0.254: C41.1 123.45,7.275 124.35,7.275 124.469,7.394 ; C42.1 124,8.275 124.638,8.275 ; v2(124.977,5.588) 124.469,6.096 124.469,7.275 ; IC8.7 124.469,7.275 ; IC8.5 124.638,8.275 ; U2.5@126.588,-1.783 126.588,-0.612 128.7,1.5 130,1.5 130.7,2.2 ; v2(128.178,5.588) 129.194,5.588 130.21,4.572 J2.7 130.21,2.69 130.7,2.2 ; R29.1 132.3,7 ; v2(141.894,5.461) 141.514,5.461 C36.1 ; IC7.7@142.475,6.425 141.3,6.425 C36.1 ; IC7.5@142.475,7.425 141.1,7.425 C35.1 ; v2(145.323,4.953) 145.704,4.953 146.085,5.334 148.325,5.334 ; C48.2 146.225,1.8 146.175,1.85 146.175,2.775 146.55,3.15 146.95,3.15 148.325,4.525 148.325,5.334 ; R24.1 148.325,5.334 ; 124.469,7.275 124.469,7.394 ; 124.469,7.394 124.469,8.107 124.638,8.275 ; 130.7,2.2 133.2,2.2 133.9,2.9 133.9,5.4 133.606,5.694 132.887,5.694 132.25,6.331 132.25,6.811 132.3,6.861 132.3,7 ; 132.3,7 132.3,7.297 132.324,7.321 132.74,7.321 133.079,7.66 133.079,7.85 133.259,8.029 134.491,8.029 134.519,8.001 137.101,8.001 138.879,9.779 140.571,9.779 140.646,9.704 140.646,8.029 140.925,7.75 C35.1 ; C36.1 C35.1
  Bottom Layer w0.254: v2(124.977,5.588) v2(128.178,5.588) ; v2(141.894,5.461) 144.815,5.461 v2(145.323,4.953)
P5V0A1: C28.1 C29.1 C49.2 IC1.5 IC1.7 J5.7 R19.1 U3.5 | length 30.9
  Top Layer w0.254: IC1.5 14.982,2.232 C28.1 16.1,1.625 C29.1 ; IC1.7 15.982,1.843 C29.1 ; v2(17.18,1.651) 17.156,1.675 C29.1 ; R19.1 18.92,9.055 20.736,7.239 v2(24.673,7.239) ; v2(18.45,1.651) 18.45,1.905 19.212,2.667 20.8,2.667 20.954,2.821 20.954,4.354 21.154,4.554 22.391,4.554 22.554,4.391 22.554,4.346 23.403,3.497 C49.2 ; U3.5@22.595,1.89 U3.5 22.753,1.89 23.403,2.54 C49.2 ; v2(24.673,5.334) 24.673,4.699 25.181,4.191 ; J5.7 25.181,4.191 ; C49.2 24.381,3.391 25.181,4.191
  Bottom Layer w0.254: v2(17.18,1.651) v2(18.45,1.651) ; v2(24.673,5.334) v2(24.673,7.239)
RFA: J4.7 R16.2 | length 15.4
  Top Layer w0.254: R16.2 28.075,8.25 35.6,8.25 37.325,6.525 37.325,4.366 J4.7
RFB: J4.8 R17.2 | length 22.7
  Top Layer w0.254: R17.2 24.325,9.275 26.1,7.5 35.08,7.5 36.23,6.35 36.23,1.77 37.5,0.5 J4.8
RFLPWR: J2.1 R34.1 U1.4 | length 12.6
  Top Layer w0.254: J2.1 137.83,3.661 138.496,2.996 142.304,2.996 142.7,2.6 144.3,2.6 145.4,1.5 145.4,-0.1 ; R34.1 145.4,-0.1 ; U1.4@146.175,-0.05 145.45,-0.05 145.4,-0.1
RST: IC1.15 J5.2 | length 26.5
  Top Layer w0.254: IC1.15 15.482,6.679 15.91,7.107 16.018,7.107 16.545,7.634 16.545,8.001 16.799,8.255 17.561,8.255 17.632,8.184 18.558,8.184 18.721,8.021 18.721,7.984 19.212,7.493 19.212,6.985 19.537,6.66 24.913,6.66 24.984,6.731 28.102,6.731 30.007,4.826 30.007,2.54 30.769,1.778 31.785,1.778 33.69,-0.127 J5.2
SCK: IC6.2 J3.4 | length 18.2
  Top Layer w0.254: IC6.2 85.9,-0.2 86.608,0.508 97.511,0.508 98.019,0 100.492,0 100.492,-1.899 J3.4
SDA: IC6.1 J3.2 | length 21.5
  Top Layer w0.254: IC6.1 85.25,-0.1 86.366,1.016 101.508,1.016 103.01,-0.486 J3.2
VCC_PREAMP: FB1.2 FB2.2 J4.1 | length 28.6
  Top Layer w0.254: FB1.2 43.85,8.107 43.85,6.95 44.379,6.421 45.12,6.421 ; J4.1 45.12,6.421 ; FB2.2 65.35,6.514 64.17,5.334 47.279,5.334 46.192,6.421 45.12,6.421
VCC_PWRAMP: C5.1 C6.1 C7.1 C8.1 J3.1 J3.3 L2.1
VCC_PWRAMPIN: C1.1 J3.7 R1.2 | length 6.2
  Top Layer w0.254: 89.775,4.85 89.775,4.55 90.404,3.921 J3.7
VREF: J5.4 R18.1 | length 31.1
  Top Layer w0.254: R18.1 5.991,2.909 10.8,-1.9 16.12,-1.9 17.336,-0.684 17.336,-0.464 18.699,0.899 v2(18.7,0.899) ; v2(21.2,0.9) 28.599,0.9 J5.4
  Bottom Layer w0.254: v2(18.7,0.899) 18.701,0.9 v2(21.2,0.9)
pads on no net: C20.1 IC1.2 IC1.3 IC1.6 IC1.8 IC1.13 IC2.1 IC2.4 IC2.5 IC2.6 IC2.7 IC2.8 IC2.9 IC2.12 IC2.13 IC2.14 IC2.15 IC2.16 IC3.5 IC7.2 IC7.3 IC7.6 IC7.8 IC7.12 IC7.13 IC7.15 IC7.16 IC8.2 IC8.3 IC8.6 IC8.8 IC8.13 J4.3 J4.4 J4.5 J4.6 J5.1 J5.3

## Polygon pours and split planes (outlines as drawn)
no net on Top Layer "Top Layer-No Net 7" (none, pour order 24): -0.948,-0.525 -1.029,-0.352 -1.078,-0.168 -1.095,0.022 -1.078,0.212 -1.029,0.396 -0.948,0.569 -0.839,0.726 -0.704,0.861 -0.547,0.97 -0.374,1.051 -0.19,1.1 0,1.117 0.19,1.1 0.374,1.051 0.547,0.97 0.704,0.861 0.839,0.726 0.948,0.569 1.029,0.396 1.078,0.212 1.095,0.022 1.078,-0.168 1.029,-0.352 0.948,-0.525 0.839,-0.682 0.704,-0.817 0.547,-0.926 0.374,-1.007 0.19,-1.056 0,-1.073 -0.19,-1.056 -0.374,-1.007 -0.547,-0.926 -0.704,-0.817 -0.839,-0.682
no net on Top Layer "Top Layer-No Net 6" (none, pour order 22): 38.567,19.432 38.567,20.932 41.107,20.932 41.107,19.432
GND on Bottom Layer "L3-No Net" (solid, pour order 26): -2.9,24.25 -0.9,26.25 -0.4,26.25 154.6,26.25 155.85,25 156.35,24.5 156.35,22.75 156.35,-1.25 155.85,-1.75 154.6,-3 153.35,-3 -1.4,-3 -2.4,-2 -2.9,-1.5 -2.9,-0.5

## Keep-outs
Keep-Out Layer:
  lines w0.1: -3,0 ccw(c0,0) 0,-3 153.5,-3 ccw(c153.5,0) 156.5,0 156.5,2.75 156.75,3 156.75,20 156.75,20.5 156.5,20.75 156.5,23.25 ccw(c153.5,23.25) 153.5,26.25 152.75,26.25 ; -3,23.25 cw(c0,23.25) 0,26.25 57,26.25 ; 62,26.25 152.75,26.25 ; 152.75,26.25 152.75,26.25

## Other copper
Top Layer:
  drawing of 159 lines, arcs and shapes, not listed

## Silkscreen, mask and mechanical layers (free items; w line width, h text height)
Top Solder:
  drawing of 64 lines, arcs and shapes, not listed
Mechanical 1:
  lines w0.1: 57,-0.25 57,-3 0,-3 cw(c0,0) -3,0 -3,13.2 -2.7,13.5 7,13.5 7.4,13.9 7.4,15.9 7,16.3 -2.7,16.3 -3,16.6 -3,23.3 cw(c-0.05,23.3) -0.05,26.25 57,26.25 57,23.5 ; 57,-0.225 cw(c59.5,-0.25) 62,-0.225 ; 57,23.475 ccw(c59.5,23.5) 62,23.475 ; 62,-0.25 62,-3 153.5,-3 ccw(c153.5,0) 156.5,0 156.5,2.75 156.75,3 156.75,20.5 156.5,20.75 156.5,23.25 ccw(c153.5,23.25) 153.5,26.25 62,26.25 62,23.5
Mechanical 3:
  drawing of 1662 lines, arcs and shapes, not listed
  text "OBUDOWA" at 182.694,159.326 h4.11
  text "A" at 184.783,139.635 h3.08
  text "A" at 408.783,139.635 h3.08
  text "40" at 393.333,134.235 h3.08 r90
  text "200" at 285.783,106.685 h3.08
  text "27" at 427.283,106.385 h3.08
  text "A - A" at 180.783,98.785 h3.08
  text "PRZYKRYWKA" at 182.194,61.326 h4.11
  text "B" at 186.533,54.035 h3.08
  text "B" at 397.783,54.035 h3.08
  text "3" at 394.333,10.035 h3.08 r90
  text "Scale" at 377.303,-9.334 h2.12
  text "1 : 1" at 379.636,-14.376 h2.12
  text "Obudowa & Przykrywka v1" at 411.844,-16.866 h3.18
  text "TITLE" at 400.703,-18.902 h2.12
  text "Name" at 375.925,-19.334 h2.12
  text "Date" at 354.703,-19.353 h2.12
  text "Rev." at 351.99,-19.396 h2.12
  text "6" at 89.371,-20.497 h3.08 r90
  text "1.0" at 351.303,-24.334 h2.12
  text "Tomek" at 379.694,-28.274 h2.12
  text "DWG.No." at 390.303,-28.924 h2.12
  text "Design by" at 351.203,-29.385 h2.12
  text "March 22, 2016" at 376.903,-34.334 h2.12
  text "Date" at 351.671,-34.353 h2.12